# EAGLE board CT_schematic (EAGLE 7.6.0)

Size 100 x 80 mm. Coordinates in mm from the lower left corner, seen from the top.
Outline: 0,0 100,0 100,80 0,80 0,0
Copper layers (1*16): Top 0.035mm / dielectric 1.5mm / Bottom 0.035mm
Design rules "default": minimum track width 10mil, minimum drill 24mil, track to track 8mil, track to pad 8mil, pad to pad 8mil, via to via 8mil, smd to smd 8mil, copper to edge 40mil, drill to drill 8mil, minimum pad ring 10mil, minimum via ring 8mil, stop-mask expansion 4mil, vias tented up to drill 0mil, thermal gap 10mil

## Footprints (pad centres in the part's own frame; a part is rotated, then mirrored left to right if it is on the bottom)
C0603 = smd 0.8 x 0.8: 1 -0.762,0; 2 0.762,0
C0402 = smd 0.5 x 0.5: 1 -0.508,0; 2 0.508,0
C0805 = smd 1.2 x 1.3: 1 -1.016,0; 2 1.016,0
C1210 = smd 1.2 x 2.5: 1 -1.524,0; 2 1.524,0
C1206 = smd 1.3 x 1.6: 1 -1.524,0; 2 1.524,0
L0603 = smd 0.8 x 0.8: 1 -0.762,0; 2 0.762,0
DR1040 = smd 1.6 x 3.2: 1 -4.458,0; 2 4.458,0
R0603 = smd 0.8 x 0.8: 1 -0.762,0; 2 0.762,0
LQFP100 = smd 0.3 x 1.2: 1 -6,-7.75; 2 -5.5,-7.75; 3 -5,-7.75; 4 -4.5,-7.75; 5 -4,-7.75; 6 -3.5,-7.75; 7 -3,-7.75; 8 -2.5,-7.75; 9 -2,-7.75; 10 -1.5,-7.75; 11 -1,-7.75; 12 -0.5,-7.75; 13 0,-7.75; 14 0.5,-7.75; 15 1,-7.75; 16 1.5,-7.75; 17 2,-7.75; 18 2.5,-7.75; 19 3,-7.75; 20 3.5,-7.75; 21 4,-7.75; 22 4.5,-7.75; 23 5,-7.75; 24 5.5,-7.75; 25 6,-7.75; 51 6,7.75; 52 5.5,7.75; 53 5,7.75; 54 4.5,7.75; 55 4,7.75; 56 3.5,7.75; 57 3,7.75; 58 2.5,7.75; 59 2,7.75; 60 1.5,7.75; 61 1,7.75; 62 0.5,7.75; 63 0,7.75; 64 -0.5,7.75; 65 -1,7.75; 66 -1.5,7.75; 67 -2,7.75; 68 -2.5,7.75; 69 -3,7.75; 70 -3.5,7.75; 71 -4,7.75; 72 -4.5,7.75; 73 -5,7.75; 74 -5.5,7.75; 75 -6,7.75 | smd 1.2 x 0.3: 26 7.75,-6; 27 7.75,-5.5; 28 7.75,-5; 29 7.75,-4.5; 30 7.75,-4; 31 7.75,-3.5; 32 7.75,-3; 33 7.75,-2.5; 34 7.75,-2; 35 7.75,-1.5; 36 7.75,-1; 37 7.75,-0.5; 38 7.75,0; 39 7.75,0.5; 40 7.75,1; 41 7.75,1.5; 42 7.75,2; 43 7.75,2.5; 44 7.75,3; 45 7.75,3.5; 46 7.75,4; 47 7.75,4.5; 48 7.75,5; 49 7.75,5.5; 50 7.75,6; 76 -7.75,6; 77 -7.75,5.5; 78 -7.75,5; 79 -7.75,4.5; 80 -7.75,4; 81 -7.75,3.5; 82 -7.75,3; 83 -7.75,2.5; 84 -7.75,2; 85 -7.75,1.5; 86 -7.75,1; 87 -7.75,0.5; 88 -7.75,0; 89 -7.75,-0.5; 90 -7.75,-1; 91 -7.75,-1.5; 92 -7.75,-2; 93 -7.75,-2.5; 94 -7.75,-3; 95 -7.75,-3.5; 96 -7.75,-4; 97 -7.75,-4.5; 98 -7.75,-5; 99 -7.75,-5.5; 100 -7.75,-6
LGA-16 = smd 1.5 x 0.4: 1 -2.1,0.975; 2 -2.1,0.325; 3 -2.1,-0.325; 4 -2.1,-0.975; 9 2.1,-0.975; 10 2.1,-0.325; 11 2.1,0.325; 12 2.1,0.975 | smd 0.4 x 1.5: 5 -0.975,-2.1; 6 -0.325,-2.1; 7 0.325,-2.1; 8 0.975,-2.1; 13 0.975,2.1; 14 0.325,2.1; 15 -0.325,2.1; 16 -0.975,2.1
MOLEX_47219-2001 = smd 0.8 x 1.5: 1 3.2,-2.1; 2 2.1,-2.1; 3 1,-2.1; 4 -0.1,-2.1; 5 -1.2,-2.1; 6 -2.3,-2.1; 7 -3.4,-2.1; 8 -4.5,-2.1 | smd 1.5 x 2.05: G1 6.875,-4.7; G2 6.875,3.6; G3 -6.875,3.6; G4 -6.875,-4.7
SSOP-28 = smd 1.5 x 0.4: 1 -3.625,4.225; 2 -3.625,3.575; 3 -3.625,2.925; 4 -3.625,2.275; 5 -3.625,1.625; 6 -3.625,0.975; 7 -3.625,0.325; 8 -3.625,-0.325; 9 -3.625,-0.975; 10 -3.625,-1.625; 11 -3.625,-2.275; 12 -3.625,-2.925; 13 -3.625,-3.575; 14 -3.625,-4.225; 15 3.625,-4.225; 16 3.625,-3.575; 17 3.625,-2.925; 18 3.625,-2.275; 19 3.625,-1.625; 20 3.625,-0.975; 21 3.625,-0.325; 22 3.625,0.325; 23 3.625,0.975; 24 3.625,1.625; 25 3.625,2.275; 26 3.625,2.925; 27 3.625,3.575; 28 3.625,4.225
182-009-MALE = drill 1.194 pad 1.524 octagon: 1 -5.537,10.923; 2 -2.769,10.923; 3 0,10.923; 4 2.769,10.923; 5 5.537,10.923; 6 -4.153,8.08; 7 -1.384,8.08; 8 1.384,8.08; 9 4.153,8.08 | hole 3.048: -12.446,9.501; 12.446,9.501
FCI_10118193-0001LF = smd 0.4 x 1.35: 1 -1.3,2.675; 2 -0.65,2.675; 3 0,2.675; 4 0.65,2.675; 5 1.3,2.675 | smd 1.6 x 1.4: 6 -3.2,2.45; 7 3.2,2.45 | smd 1.9 x 1.9: 8 -1.2,0; 9 1.2,0 | hole 0.5: -3.3,0; 3.3,0
SOT143B = smd 1 x 0.7: 1 -0.75,-1 | smd 0.6 x 0.7: 2 0.95,-1; 3 0.95,1; 4 -0.95,1
QFN-28 = smd 0.813 x 0.305: 1 -2.451,1.5; 2 -2.451,1; 3 -2.451,0.5; 4 -2.451,0; 5 -2.451,-0.5; 6 -2.451,-1; 7 -2.451,-1.5; 15 2.451,-1.5; 16 2.451,-1; 17 2.451,-0.5; 18 2.451,0; 19 2.451,0.5; 20 2.451,1; 21 2.451,1.5 | smd 0.305 x 0.813: 8 -1.5,-2.451; 9 -1,-2.451; 10 -0.5,-2.451; 11 0,-2.451; 12 0.5,-2.451; 13 1,-2.451; 14 1.5,-2.451; 22 1.5,2.451; 23 1,2.451; 24 0.5,2.451; 25 0,2.451; 26 -0.5,2.451; 27 -1,2.451; 28 -1.5,2.451 | smd 3.607 x 3.607: 29 0,0
SJ-43515TS-SMT-TR = smd 2.2 x 3: 1 0.6,-7.4; 4 3.4,-7.4 | smd 3 x 3: 2 12.8,-7.4; 5 17,-3 | smd 2 x 3: 3 5.3,0; 6 2.5,0 | drill 1.8: P$7 4.5,-3.69; P$8 11.54,-3.69
ABLS-25.000MHZ-B2F-T = smd 5.6 x 2.8: 1 -3.81,0; 2 5.69,0
ASEK = smd 1.4 x 1: 1 -1.1,-0.8; 2 1.1,-0.8; 3 1.1,0.8; 4 -1.1,0.8
ASFL1 = smd 1.7 x 1.5: 1 -1.27,-1.1; 2 1.27,-1.1; 3 1.27,1.1; 4 -1.27,1.1
TSOT-23-5 = smd 1.3 x 0.62: 1 -1.31,0.95; 2 -1.31,0; 3 -1.31,-0.95; 4 1.31,-0.95; 5 1.31,0.95
DFN8_2X3MC = smd 0.813 x 0.305: 1 -1.398,0.75; 2 -1.398,0.25; 3 -1.398,-0.25; 4 -1.398,-0.75; 5 1.398,-0.75; 6 1.398,-0.25; 7 1.398,0.25; 8 1.398,0.75 | smd 1.753 x 1.549: 9 0,0
JST-2-SMD = smd 1 x 4.6: 1 -1,-3.7; 2 1,-3.7 | smd 1.6 x 3.4: NC1 -3.4,1.5; NC2 3.4,1.5
SON-6 = smd 0.55 x 0.3: 1 -0.355,0.5 | smd 0.52 x 0.3: 2 -0.37,0; 3 -0.37,-0.5; 4 0.37,-0.5; 5 0.37,0; 6 0.37,0.5
SW_4-1437565-2 = smd 1.4 x 2.1: 1 -2.23,4.55; 2 -2.23,-4.55; 3 2.23,4.55; 4 2.23,-4.55
LGM67K-G1J2-24-Z = smd 0.8 x 1.4: A -2,0; C 0,0
NC7SZ125M5X = smd 1.3 x 0.7: 1 -1.3,0.95; 2 -1.3,0; 3 -1.3,-0.95; 4 1.3,-0.95; 5 1.3,0.95
DUMMY_PACKAGE_211 = drill 0.3: 1 0,-1; 2 1.5,-1; 3 3,-1

## Placement (x,y rotation side)
C1  1e-06  [C0603]  -19.05,83.82 0 top  (outside the outline)
C2  1e-07  [C0603]  -22.86,83.82 0 top  (outside the outline)
C3  1e-07  [C0603]  -26.67,83.82 0 top  (outside the outline)
C4  1e-07  [C0603]  -30.48,83.82 0 top  (outside the outline)
C5  1e-07  [C0603]  -34.29,83.82 0 top  (outside the outline)
C6  1e-07  [C0603]  -38.1,83.82 0 top  (outside the outline)
C7  1e-07  [C0603]  -41.91,83.82 0 top  (outside the outline)
C8  4.7e-06  [C0603]  -74.93,78.74 0 top  (outside the outline)
C9  2.2e-06  [C0603]  -78.74,78.74 0 top  (outside the outline)
C10  2.2e-06  [C0603]  -82.55,78.74 0 top  (outside the outline)
C11  1e-08  [C0603]  -45.72,83.82 0 top  (outside the outline)
C12  1e-06  [C0603]  -49.53,83.82 0 top  (outside the outline)
C13  1e-11  [C0402]  -80.01,83.82 0 top  (outside the outline)
C14  1e-11  [C0402]  -83.82,83.82 0 top  (outside the outline)
C15  1e-06  [C0603]  -53.34,83.82 0 top  (outside the outline)
C16  1e-08  [C0402]  -15.24,88.9 0 top  (outside the outline)
C17  1e-08  [C0402]  -19.05,88.9 0 top  (outside the outline)
C18  1e-08  [C0402]  -22.86,88.9 0 top  (outside the outline)
C19  4.7e-07  [C0603]  -15.24,83.82 0 top  (outside the outline)
C20  1e-07  [C0402]  -26.67,88.9 0 top  (outside the outline)
C21  1e-05  [C0805]  -74.93,66.04 0 top  (outside the outline)
C22  1e-07  [C0402]  -30.48,88.9 0 top  (outside the outline)
C23  1e-07  [C0402]  -34.29,88.9 0 top  (outside the outline)
C24  1e-07  [C0402]  -38.1,88.9 0 top  (outside the outline)
C25  1e-07  [C0402]  -41.91,88.9 0 top  (outside the outline)
C26  1e-07  [C0402]  -45.72,88.9 0 top  (outside the outline)
C27  2.2e-05  [C1210]  -44.45,66.04 0 top  (outside the outline)
C28  2.2e-05  [C1210]  -50.8,66.04 0 top  (outside the outline)
C29  1e-09  [C0402]  -49.53,88.9 0 top  (outside the outline)
C30  1e-09  [C0402]  -53.34,88.9 0 top  (outside the outline)
C31  1e-07  [C0402]  -57.15,88.9 0 top  (outside the outline)
C32  1e-07  [C0402]  -60.96,88.9 0 top  (outside the outline)
C33  1e-07  [C0402]  -64.77,88.9 0 top  (outside the outline)
C34  1e-07  [C0402]  -68.58,88.9 0 top  (outside the outline)
C35  1e-07  [C0402]  -72.39,88.9 0 top  (outside the outline)
C36  1e-05  [C0805]  -80.01,66.04 0 top  (outside the outline)
C37  1e-05  [C0805]  -85.09,66.04 0 top  (outside the outline)
C38  1e-05  [C0805]  -15.24,73.66 0 top  (outside the outline)
C39  1e-05  [C0805]  -20.32,73.66 0 top  (outside the outline)
C40  1e-05  [C0805]  -25.4,73.66 0 top  (outside the outline)
C41  1e-08  [C0402]  -76.2,88.9 0 top  (outside the outline)
C42  1e-08  [C0402]  -80.01,88.9 0 top  (outside the outline)
C43  1e-05  [C0805]  -30.48,73.66 0 top  (outside the outline)
C44  1e-05  [C0805]  -35.56,73.66 0 top  (outside the outline)
C45  1e-07  [C0402]  -83.82,88.9 0 top  (outside the outline)
C46  1e-05  [C1206]  -57.15,66.04 0 top  (outside the outline)
C47  1e-05  [C1206]  -63.5,66.04 0 top  (outside the outline)
C48  1e-08  [C0402]  -15.24,93.98 0 top  (outside the outline)
F1  240.0  [L0603]  -57.15,83.82 0 top  (outside the outline)
I1  2.5e-06  [DR1040]  -66.04,44.45 0 top  (outside the outline)
R2  1000.0  [R0603]  -60.96,83.82 0 top  (outside the outline)
R4  4700.0  [R0603]  -64.77,83.82 0 top  (outside the outline)
R5  10000.0  [R0603]  -30.48,78.74 0 top  (outside the outline)
R6  10000.0  [R0603]  -35.56,78.74 0 top  (outside the outline)
R7  10000.0  [R0603]  -40.64,78.74 0 top  (outside the outline)
R8  100000.0  [R0603]  -53.34,73.66 0 top  (outside the outline)
R9  100000.0  [R0603]  -58.42,73.66 0 top  (outside the outline)
R10  100000.0  [R0603]  -63.5,73.66 0 top  (outside the outline)
R11  100000.0  [R0603]  -68.58,73.66 0 top  (outside the outline)
R12  100000.0  [R0603]  -73.66,73.66 0 top  (outside the outline)
R13  100000.0  [R0603]  -78.74,73.66 0 top  (outside the outline)
R14  100000.0  [R0603]  -83.82,73.66 0 top  (outside the outline)
R15  47000.0  [R0603]  -45.72,78.74 0 top  (outside the outline)
R16  47000.0  [R0603]  -50.8,78.74 0 top  (outside the outline)
R17  47000.0  [R0603]  -55.88,78.74 0 top  (outside the outline)
R18  680.0  [R0603]  -68.58,83.82 0 top  (outside the outline)
R19  220000.0  [R0603]  -15.24,78.74 0 top  (outside the outline)
R20  1000000.0  [R0603]  -48.26,73.66 0 top  (outside the outline)
R21  10000.0  [R0603]  -60.96,78.74 0 top  (outside the outline)
R22  10000.0  [R0603]  -66.04,78.74 0 top  (outside the outline)
R23  9100.0  [R0603]  -72.39,83.82 0 top  (outside the outline)
R24  680000.0  [R0603]  -20.32,78.74 0 top  (outside the outline)
R25  120000.0  [R0603]  -25.4,78.74 0 top  (outside the outline)
R26  2000.0  [R0603]  -76.2,83.82 0 top  (outside the outline)
R27  10000.0  [R0603]  -71.12,78.74 0 top  (outside the outline)
U1  STM32F401VDT6  [LQFP100]  -63.5,8.89 0 top  (outside the outline)
U2  l3g4200d  [LGA-16]  -16.51,67.31 0 top  (outside the outline)
U3  0472192001  [MOLEX_47219-2001]  -22.86,30.48 0 top  (outside the outline)
U4  ST3241EBPR  [SSOP-28]  -39.37,30.48 0 top  (outside the outline)
U5  182-009-113R531  [182-009-MALE]  -36.83,6.35 0 top  (outside the outline)
U6  10118193-0001LF  [FCI_10118193-0001LF]  -39.37,57.15 0 top  (outside the outline)
U7  prtr5v0u2ax  [SOT143B]  -27.94,93.98 0 top  (outside the outline)
U8  WM8731CLSEFL  [QFN-28]  -36.83,66.04 0 top  (outside the outline)
U9  SJ-43515TS-SMT-TR  [SJ-43515TS-SMT-TR]  -71.12,31.75 0 top  (outside the outline)
U10  SJ-43515TS-SMT-TR  [SJ-43515TS-SMT-TR]  -39.37,48.26 0 top  (outside the outline)
U11  ABLS-25.000MHZ-B2F-T  [ABLS-25.000MHZ-B2F-T]  -77.47,57.15 0 top  (outside the outline)
U12  ASEK-32.768KHz-ECST  [ASEK]  -60.96,57.15 0 top  (outside the outline)
U13  ASFL1-12.288MHZ-EC-T  [ASFL1]  -30.48,58.42 0 top  (outside the outline)
U14  ltc3406es5  [TSOT-23-5]  -40.64,72.39 0 top  (outside the outline)
U15  MCP73831T-2ACI/MC  [DFN8_2X3MC]  -43.18,92.71 0 top  (outside the outline)
U16  S2B-PH-SM4-TB(LF)(SN)  [JST-2-SMD]  -81.28,44.45 0 top  (outside the outline)
U17  TPS3895ADRYR  [SON-6]  -36.83,92.71 0 top  (outside the outline)
U18  4-1437565-2  [SW_4-1437565-2]  -55.88,44.45 0 top  (outside the outline)
U19  Q65110A2395  [LGM67K-G1J2-24-Z]  -24.13,66.04 0 top  (outside the outline)
U20  nc7sz125m5x  [NC7SZ125M5X]  -68.58,64.77 0 top  (outside the outline)
U21  Dummy  [DUMMY_PACKAGE_211]  -34.29,93.98 0 top  (outside the outline)

## Library data of the parts
C1-C48 F1 I1 R2 R4-R27 U1-U21 = circuit_tree

## Nets
CLK_CRYSTAL_U1_12: C13.1 U1.12 U11.1
CLK_CRYSTAL_U1_13: C14.1 U1.13 U11.2
CLK_U1_8: U1.8 U12.3
CLK_U8_1: U8.1 U13.3
GND: C1.2 C2.2 C3.2 C4.2 C5.2 C6.2 C7.2 C8.2 C9.2 C10.2 C11.2 C12.2 C13.2 C14.2 C15.2 C16.2 C17.2 C18.2 C20.2 C21.2 C22.2 C25.2 C26.2 C30.2 C31.2 C32.2 C33.2 C34.2 C35.2 C36.2 C37.2 C38.2 C39.2 C40.2 C41.2 C42.2 C43.2 C44.1 C44.2 C45.2 C46.2 C47.2 C48.2 R2.2 R5.2 R6.1 R6.2 R15.2 R16.2 R17.2 R19.2 R23.2 R25.2 R26.2 U1.10 U1.20 U1.27 U1.49 U1.70 U1.74 U1.99 U2.8 U2.9 U2.10 U2.11 U2.12 U2.13 U3.6 U3.G1 U3.G2 U3.G3 U3.G4 U4.23 U4.25 U5.5 U6.5 U6.6 U6.7 U6.8 U6.9 U7.1 U8.4 U8.15 U8.19 U8.25 U8.26 U8.29 U9.1 U10.1 U12.2 U13.2 U14.2 U15.6 U15.9 U16.2 U17.2 U19.C U20.1 U20.3 U21.1
INPUT_USBPOWER_5V: C15.1 C46.1 R27.2 U1.68 U6.1 U7.4 U15.1 U15.2
NET_U1_14: R4.1 U1.14 U20.4
NET_U1_22: C11.1 C12.1 F1.1 U1.21 U1.22
NET_U1_48: C9.1 U1.48
NET_U1_73: C10.1 U1.73
NET_U1_94: R5.1 U1.94
NET_U1_97: U19.A
NET_U1_98: U18.3 U18.4
NET_U2_14: C18.1 C19.1 U2.14
NET_U2_ATNET_1: C19.2
NET_U4_1: C24.1 U4.1
NET_U4_2: C24.2 U4.2
NET_U4_3: C26.1 U4.3
NET_U4_22: R14.1 U4.22
NET_U4_24: C23.2 U4.24
NET_U4_27: C25.1 U4.27
NET_U4_28: C23.1 U4.28
NET_U5_2: U4.4 U5.2
NET_U5_3: U4.9 U5.3
NET_U5_7: U4.5 U5.7
NET_U5_8: U4.10 U5.8
NET_U8_9: U8.9
NET_U8_20: C35.1 C40.1 U8.20
NET_U9_2: C28.1 R16.1 U9.2
NET_U9_5: C27.1 R15.1 U9.5
NET_U9_13: C27.2
NET_U9_14: C28.2
NET_U10_5: C29.1 C30.1 R17.1 R18.1 U10.5
NET_U10_21: R18.2
NET_U10_22: C29.2
NET_U14_1: U14.1
NET_U14_3: I1.1 U14.3
NET_U14_5: R19.1 R20.1 U14.5
NET_U14_ATNET_3: I1.2 R20.2
NET_U15_5: R27.1 U15.5
NET_U15_8: R26.1 U15.8
NET_U17_1: R22.1 R23.1 U17.1
NET_U17_3: R24.2 R25.1 U17.3
NET_U17_4: R21.1 U17.4 U20.2
NET_U18_1: R2.1 U18.1 U18.2
PROC_I2S2_CK: U1.47 U8.7
PROC_I2S2_EXT_SD: U1.17 U8.10
PROC_I2S2_SD: U1.18 U8.8
PROC_I2S2_WS: U1.51 U8.9 U8.11
PROC_SDIO_CK: R9.1 U1.80 U3.5
PROC_SDIO_CMD: R8.1 U1.83 U3.3
PROC_SDIO_D0: R10.1 U1.65 U3.7
PROC_SDIO_D1: R11.1 U1.66 U3.8
PROC_SDIO_D2: R12.1 U1.78 U3.1
PROC_SDIO_D3: R13.1 U1.79 U3.2
PROC_SPI1_MISO: U1.31 U2.4
PROC_SPI1_MOSI: U1.32 U2.3
PROC_SPI1_NSS: R7.1 U1.29 U2.5
PROC_SPI1_SCK: U1.30 U2.2
PROC_TIM1_CH2: U1.42 U21.2
PROC_TIM1_CH4: U1.45 U21.3
PROC_USART2_CTS: U1.23 U4.13
PROC_USART2_RTS: U1.24 U4.18
PROC_USART2_RX: U1.26 U4.19
PROC_USART2_TX: U1.25 U4.14
PROC_USB_OTG_FS_DM: U1.70 U6.2 U7.3
PROC_USB_OTG_FS_DP: U1.71 U6.3 U7.2
VCC_S1_3V7: C43.1 C47.1 U14.4 U15.3 U15.4 U16.1
VCC_TIER1_3V3: C1.1 C2.1 C3.1 C4.1 C5.1 C6.1 C7.1 C8.1 C16.1 C17.1 C20.1 C21.1 C22.1 C31.1 C32.1 C33.1 C34.1 C36.1 C37.1 C38.1 C39.1 C41.1 C42.1 C44.2 C45.1 C48.1 F1.2 I1.2 R4.2 R7.2 R8.2 R9.2 R10.2 R11.2 R12.2 R13.2 R14.2 R20.2 R21.2 R22.2 R24.1 U1.6 U1.11 U1.19 U1.28 U1.50 U1.75 U1.100 U2.1 U2.15 U2.16 U3.4 U4.26 U8.3 U8.5 U8.12 U8.18 U12.4 U13.4 U17.6 U20.5

## Tracks (layer width: path | path; a pad name or v marks a point on that pad's centre or on a via)
CLK_CRYSTAL_U1_12  (2 unrouted)
CLK_CRYSTAL_U1_13  (2 unrouted)
CLK_U1_8  (1 unrouted)
CLK_U8_1  (1 unrouted)
GND  (99 unrouted)
INPUT_USBPOWER_5V  (7 unrouted)
NET_U1_14  (2 unrouted)
NET_U1_22  (4 unrouted)
NET_U1_48  (1 unrouted)
NET_U1_73  (1 unrouted)
NET_U1_94  (1 unrouted)
NET_U1_98  (1 unrouted)
NET_U2_14  (2 unrouted)
NET_U4_1  (1 unrouted)
NET_U4_2  (1 unrouted)
NET_U4_3  (1 unrouted)
NET_U4_22  (1 unrouted)
NET_U4_24  (1 unrouted)
NET_U4_27  (1 unrouted)
NET_U4_28  (1 unrouted)
NET_U5_2  (1 unrouted)
NET_U5_3  (1 unrouted)
NET_U5_7  (1 unrouted)
NET_U5_8  (1 unrouted)
NET_U8_20  (2 unrouted)
NET_U9_2  (2 unrouted)
NET_U9_5  (2 unrouted)
NET_U10_5  (4 unrouted)
NET_U14_3  (1 unrouted)
NET_U14_5  (2 unrouted)
NET_U14_ATNET_3  (1 unrouted)
NET_U15_5  (1 unrouted)
NET_U15_8  (1 unrouted)
NET_U17_1  (2 unrouted)
NET_U17_3  (2 unrouted)
NET_U17_4  (2 unrouted)
NET_U18_1  (2 unrouted)
PROC_I2S2_CK  (1 unrouted)
PROC_I2S2_EXT_SD  (1 unrouted)
PROC_I2S2_SD  (1 unrouted)
PROC_I2S2_WS  (2 unrouted)
PROC_SDIO_CK  (2 unrouted)
PROC_SDIO_CMD  (2 unrouted)
PROC_SDIO_D0  (2 unrouted)
PROC_SDIO_D1  (2 unrouted)
PROC_SDIO_D2  (2 unrouted)
PROC_SDIO_D3  (2 unrouted)
PROC_SPI1_MISO  (1 unrouted)
PROC_SPI1_MOSI  (1 unrouted)
PROC_SPI1_NSS  (2 unrouted)
PROC_SPI1_SCK  (1 unrouted)
PROC_TIM1_CH2  (1 unrouted)
PROC_TIM1_CH4  (1 unrouted)
PROC_USART2_CTS  (1 unrouted)
PROC_USART2_RTS  (1 unrouted)
PROC_USART2_RX  (1 unrouted)
PROC_USART2_TX  (1 unrouted)
PROC_USB_OTG_FS_DM  (2 unrouted)
PROC_USB_OTG_FS_DP  (2 unrouted)
VCC_S1_3V7  (5 unrouted)
VCC_TIER1_3V3  (60 unrouted)